# Altium PCB Logic_Analyzer_ASCII.PcbDoc
Units mm, origin at the board's own origin, x right, y up, seen from the top; angles counter-clockwise.
Board outline 38 x 26 mm, 2 copper layers (Top Layer, Bottom Layer); 45 components, 43 nets, 221 pads, 80 vias.
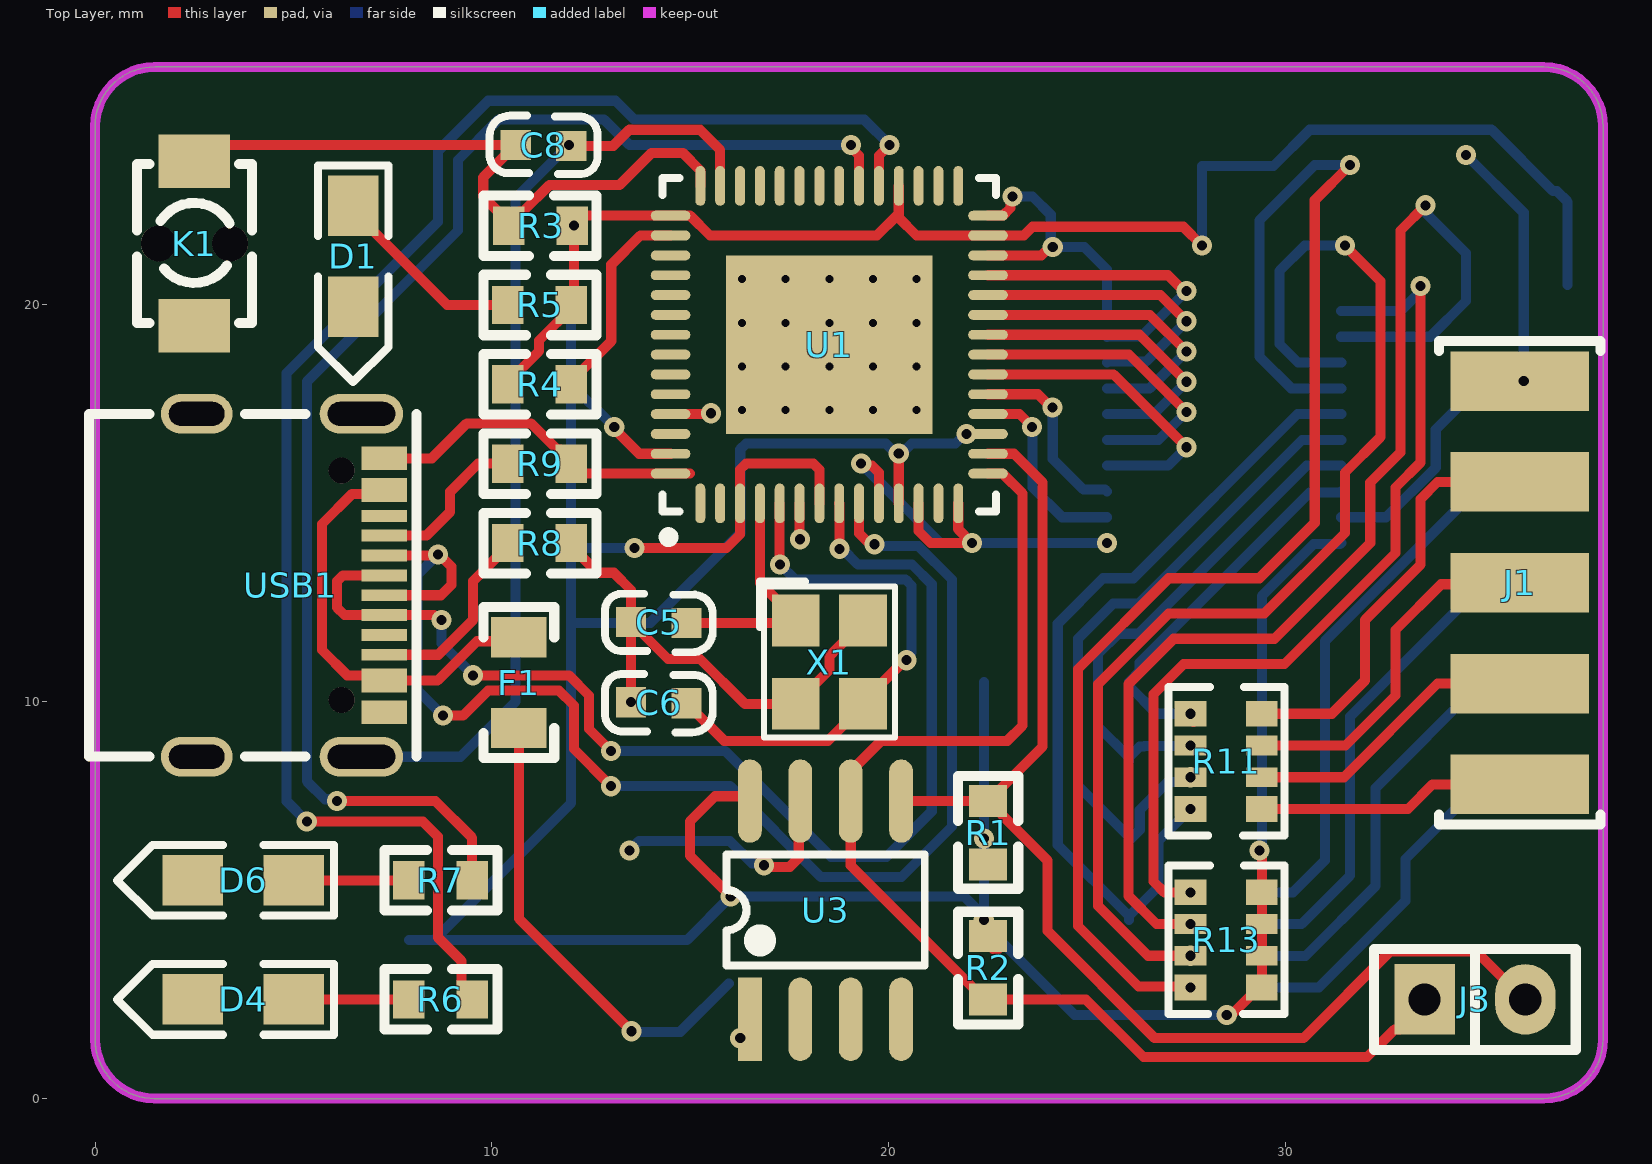
[diagram p0: Top Layer view]
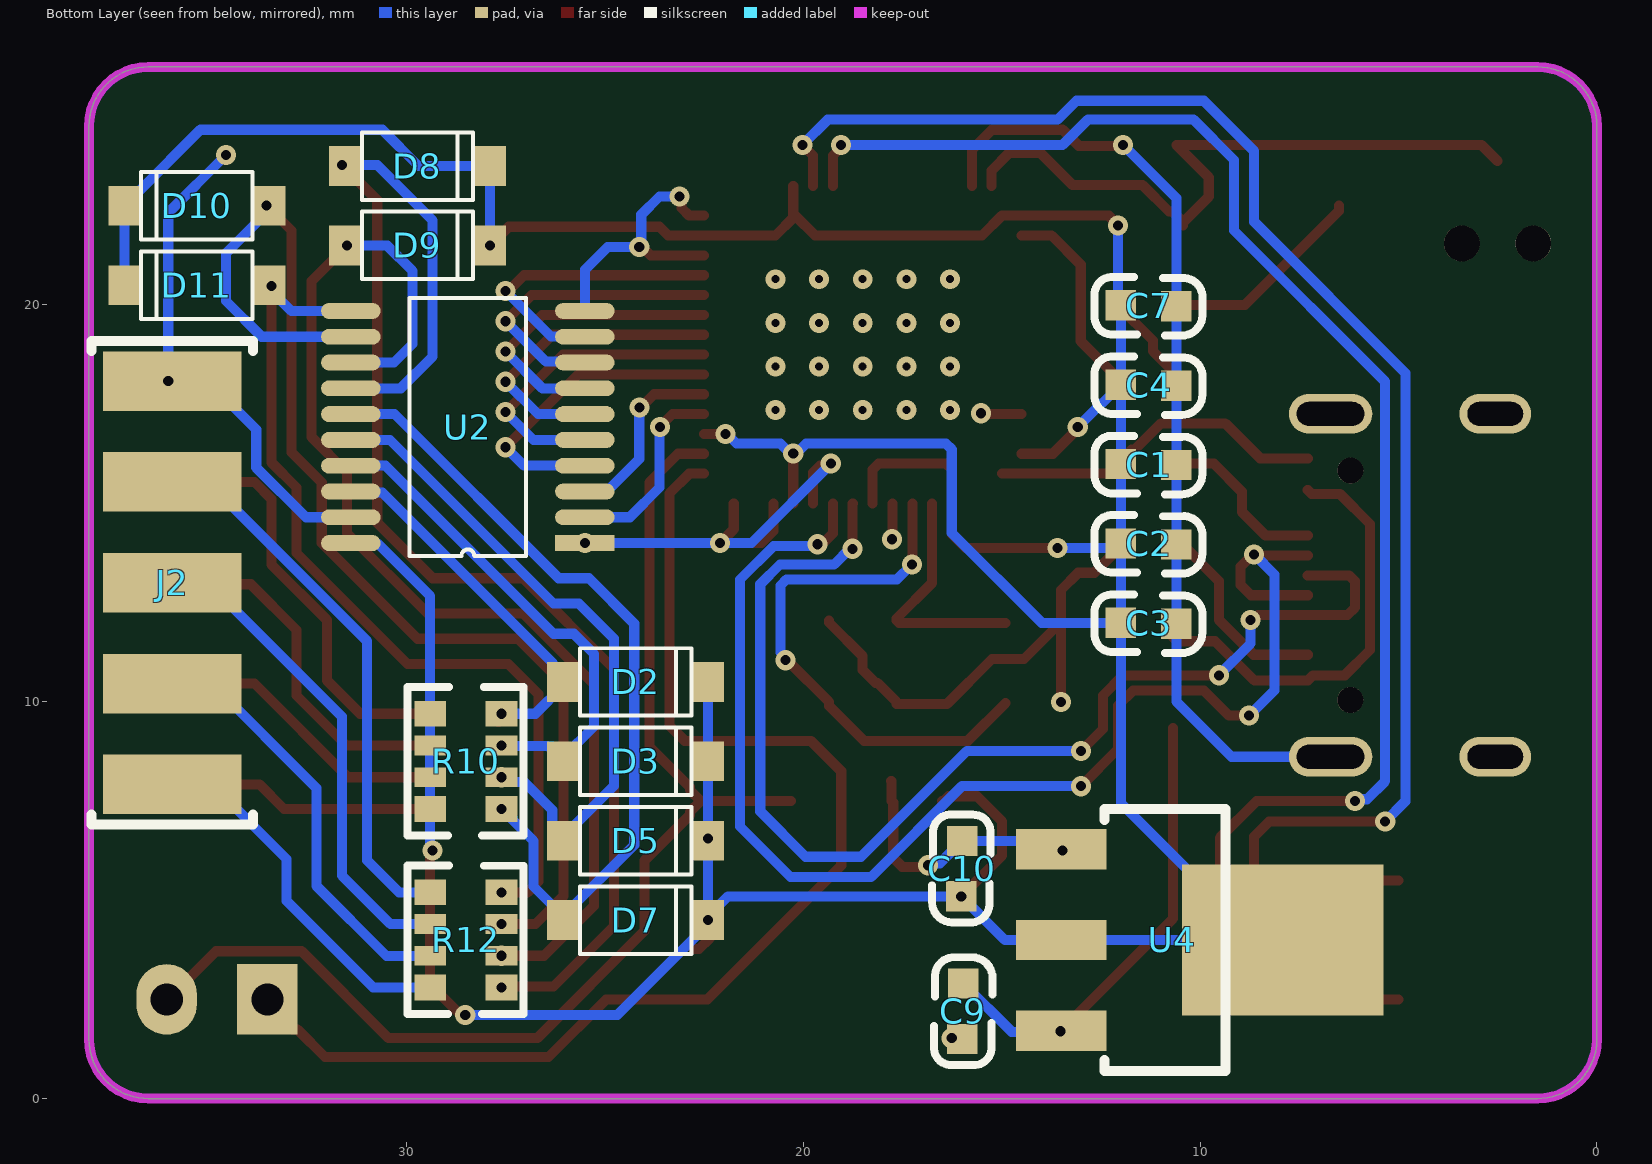
[diagram p1: Bottom Layer view, seen from below]

## Layer stack, top to bottom
Top Solder: solder mask 0.0102, Solder Resist, Dk 3.5
Top Layer: signal copper 0.0356
Dielectric 1: dielectric 0.32, FR-4, Dk 4.8
Bottom Layer: signal copper 0.0356
Bottom Solder: solder mask 0.0102, Solder Resist, Dk 3.5

## Board outline
1.5,0 cw(c1.5,1.5) 0,1.5 0,24.5 cw(c1.5,24.5) 1.5,26 36.5,26 cw(c36.5,24.5) 38,24.5 38,1.5 cw(c36.5,1.5) 36.5,0

## Design rules (kind name [scope] priority, off if disabled: settings)
AssemblyTestPointUsage [All] p0: scope1count=1 scope1_0_kind=Board scope1_0_value=Board scope2count=1 scope2_0_kind=Board scope2_0_value=Board commentlength=0
AssemblyTestpoint [All] p0: scope1count=1 scope1_0_kind=Board scope1_0_value=Board scope2count=1 scope2_0_kind=Board scope2_0_value=Board commentlength=0
Clearance [All] p0: scope1count=1 scope1_0_kind=Board scope1_0_value=Board scope2count=1 scope2_0_kind=Board scope2_0_value=Board commentlength=0 gap=0.127
Clearance [All] p1: gap=0.127 ignorepadtopadclearanceinfootprint=TRUE except(0.254: Arc-Fill Arc-Poly Arc-Region Track-Fill Track-Poly Track-Region SMDPad-Fill SMDPad-Poly SMDPad-Region THPad-Fill THPad-Poly THPad-Region Via-Fill Via-Poly Via-Region Fill-Fill Fill-Poly Fill-Region Poly-Poly Poly-Region Region-Region)
ComponentClearance [All] p0: scope1count=1 scope1_0_kind=Board scope1_0_value=Board scope2count=1 scope2_0_kind=Board scope2_0_value=Board commentlength=0 gap=0.254 collisioncheckmode=3
DiffPairsRouting [All] p0: scope1count=1 scope1_0_kind=Board scope1_0_value=Board scope2count=1 scope2_0_kind=Board scope2_0_value=Board commentlength=0
DiffPairsRouting [All] p1: maxlimit=0.254 minlimit=0.089 mostfreqgap=0.254 toplayer_minwidth=0.089 toplayer_maxwidth=0.762 toplayer_prefwidth=0.381 bottomlayer_minwidth=0.089 bottomlayer_maxwidth=0.762 bottomlayer_prefwidth=0.381 maxuncoupledlength=12.7
FabricationTestPointUsage [All] p0: scope1count=1 scope1_0_kind=Board scope1_0_value=Board scope2count=1 scope2_0_kind=Board scope2_0_value=Board commentlength=0 valid=0 allowmultiple=FALSE
FabricationTestpoint [All] p0: scope1count=1 scope1_0_kind=Board scope1_0_value=Board scope2count=1 scope2_0_kind=Board scope2_0_value=Board commentlength=0 side=3 testpointundercomponent=TRUE minsize=1.016 maxsize=2.54 preferedsize=1.524 minholesize=0 maxholesize=1.016 preferedholesize=0.813 testpointgrid=0.025
FanoutControl Fanout_BGA [All] p0 off: scope1count=1 scope1_0_kind=Board scope1_0_value=Board scope2count=1 scope2_0_kind=Board scope2_0_value=Board commentlength=69 // Protel DXP Scope 1 Expression Was: IsBGA   Fanout_BGA (Default Rule)
FanoutControl Fanout_LCC [All] p0 off: scope1count=1 scope1_0_kind=Board scope1_0_value=Board scope2count=1 scope2_0_kind=Board scope2_0_value=Board commentlength=69 // Protel DXP Scope 1 Expression Was: IsLCC   Fanout_LCC (Default Rule)
FanoutControl Fanout_SOIC [All] p0 off: scope1count=1 scope1_0_kind=Board scope1_0_value=Board scope2count=1 scope2_0_kind=Board scope2_0_value=Board commentlength=71 // Protel DXP Scope 1 Expression Was: IsSOIC   Fanout_SOIC (Default Rule)
FanoutControl Fanout_Small [All] p0 off: scope1count=1 scope1_0_kind=Board scope1_0_value=Board scope2count=1 scope2_0_kind=Board scope2_0_value=Board commentlength=84 // Protel DXP Scope 1 Expression Was: (CompPinCount < 5)   Fanout_Small (Default Rule)
FanoutControl Fanout_Default [All] p0: scope1count=1 scope1_0_kind=Board scope1_0_value=Board scope2count=1 scope2_0_kind=Board scope2_0_value=Board commentlength=30 // Fanout_Default (Default Rule)
Height [All] p0: scope1count=1 scope1_0_kind=Board scope1_0_value=Board scope2count=1 scope2_0_kind=Board scope2_0_value=Board commentlength=0
HoleSize [All] p0: scope1count=1 scope1_0_kind=Board scope1_0_value=Board scope2count=1 scope2_0_kind=Board scope2_0_value=Board commentlength=0 absolutevalues=TRUE maxlimit=2.54 minlimit=0.025 maxpercent=80.000 minpercent=20.000
HoleToHoleClearance [All] p0: scope1count=1 scope1_0_kind=Board scope1_0_value=Board scope2count=1 scope2_0_kind=Board scope2_0_value=Board commentlength=0
LayerPairs [All] p0: scope1count=1 scope1_0_kind=Board scope1_0_value=Board scope2count=1 scope2_0_kind=Board scope2_0_value=Board commentlength=0 enforce=TRUE
MinimumSolderMaskSliver [All] p0: scope1count=1 scope1_0_kind=Board scope1_0_value=Board scope2count=1 scope2_0_kind=Board scope2_0_value=Board commentlength=0
MinimumSolderMaskSliver [All] p1: minsoldermaskwidth=0
NetAntennae [All] p0: scope1count=1 scope1_0_kind=Board scope1_0_value=Board scope2count=1 scope2_0_kind=Board scope2_0_value=Board commentlength=0
PasteMaskExpansion [All] p0: scope1count=1 scope1_0_kind=Board scope1_0_value=Board scope2count=1 scope2_0_kind=Board scope2_0_value=Board commentlength=0 expansion=0
PlaneClearance [All] p0: scope1count=1 scope1_0_kind=Board scope1_0_value=Board scope2count=1 scope2_0_kind=Board scope2_0_value=Board commentlength=0 clearance=0.508
PlaneConnect [All] p0: scope1count=1 scope1_0_kind=Board scope1_0_value=Board scope2count=1 scope2_0_kind=Board scope2_0_value=Board commentlength=0 planeconnectstyle=Relief reliefexpansion=0.508 reliefentries=4 reliefconductorwidth=0.254 reliefairgap=0.254
PolygonConnect [All] p0: scope1count=1 scope1_0_kind=Board scope1_0_value=Board scope2count=1 scope2_0_kind=Board scope2_0_value=Board commentlength=0 connectstyle=Relief reliefconductorwidth=0.254 reliefentries=4 polygonreliefangle="90 Angle"
PolygonConnect [All] p1: connectstyle=Relief reliefconductorwidth=0.254 reliefentries=4 polygonreliefangle="90 Angle" airgapwidth=0.254
RoutingCorners [All] p0: scope1count=1 scope1_0_kind=Board scope1_0_value=Board scope2count=1 scope2_0_kind=Board scope2_0_value=Board commentlength=0 cornerstyle=45-Degree minsetback=2.54 maxsetback=2.54
RoutingLayers [All] p0: scope1count=1 scope1_0_kind=Board scope1_0_value=Board scope2count=1 scope2_0_kind=Board scope2_0_value=Board commentlength=0 top layer=Automatic bottom layer=Automatic
RoutingPriority [All] p0: scope1count=1 scope1_0_kind=Board scope1_0_value=Board scope2count=1 scope2_0_kind=Board scope2_0_value=Board commentlength=0
RoutingTopology [All] p0: scope1count=1 scope1_0_kind=Board scope1_0_value=Board scope2count=1 scope2_0_kind=Board scope2_0_value=Board commentlength=0 topology=Shortest
RoutingVias [All] p0: scope1count=1 scope1_0_kind=Board scope1_0_value=Board scope2count=1 scope2_0_kind=Board scope2_0_value=Board commentlength=0 holewidth=0.711 width=1.27 viastyle="Through Hole" minholewidth=0.2 minwidth=0.4 maxholewidth=6.3 maxwidth=8.3
RoutingVias [All] p1: holewidth=0.711 width=1.27 viastyle="Through Hole" minholewidth=0.2 minwidth=0.4 maxholewidth=6.3 maxwidth=8.3
ShortCircuit [All] p0: scope1count=1 scope1_0_kind=Board scope1_0_value=Board scope2count=1 scope2_0_kind=Board scope2_0_value=Board commentlength=0 allowed=FALSE
SilkToBoardRegionClearance [All] p0: scope1count=1 scope1_0_kind=Board scope1_0_value=Board scope2count=1 scope2_0_kind=Board scope2_0_value=Board commentlength=0
SilkToSilkClearance [All] p0: scope1count=1 scope1_0_kind=Board scope1_0_value=Board scope2count=1 scope2_0_kind=Board scope2_0_value=Board commentlength=0
SilkToSolderMaskClearance [All] p0 off: scope1count=1 scope1_0_kind=Board scope1_0_value=Board scope2count=1 scope2_0_kind=Board scope2_0_value=Board commentlength=44 // Protel DXP Scope 1 Expression Was: IsPad
SilkToSolderMaskClearance [IsPad] p1: minsilkscreentomaskgap=0 clearancetoexposedcopper=TRUE
SolderMaskExpansion [All] p0: scope1count=1 scope1_0_kind=Board scope1_0_value=Board scope2count=1 scope2_0_kind=Board scope2_0_value=Board commentlength=0 expansion=0.102
SolderMaskExpansion [All] p1: expansion=0.102 istentingtop=FALSE
UnRoutedNet [All] p0: scope1count=1 scope1_0_kind=Board scope1_0_value=Board scope2count=1 scope2_0_kind=Board scope2_0_value=Board commentlength=0
UnpouredPolygon [All] p0: scope1count=1 scope1_0_kind=Board scope1_0_value=Board scope2count=1 scope2_0_kind=Board scope2_0_value=Board commentlength=0
Width [All] p0: scope1count=1 scope1_0_kind=Board scope1_0_value=Board scope2count=1 scope2_0_kind=Board scope2_0_value=Board commentlength=0 maxlimit=0.762 minlimit=0.089 preferedwidth=0.254
Width [All] p1: maxlimit=0.762 minlimit=0.089 preferedwidth=0.254
27 further rules are at their usual default settings.

## Components (designator, comment, footprint, x,y, rotation, side; value= is the part's Value field where it differs from the comment)
C1 "100nF" 0603C 12,16 r180 bottom locked
C2 "100nF" 0603C 12,14 r180 bottom locked
C3 "100nF" 0603C 12,12 r180 bottom locked
C4 "100nF" 0603C 12,18 r180 bottom locked
C5 "" 0603C 13.5,12.021 r0 top
C6 "20pF" 0603C 13.5,10 r0 top
C7 "100nF" 0603C 12,20 r180 bottom locked
C8 "100nF" 0603C 12,24 r180 top
C9 "10uF" 0603C 16,1.5 r90 bottom
C10 "10uF" 0603C 15.982,6.5 r270 bottom
D1 "0805R" LED-0805R 6.5,22.5 r270 top
D2 "FR107W" SOD-123 26,10.5 r180 bottom
D3 "FR107W" SOD-123 26,8.5 r180 bottom
D4 "0805B" LED-0805B 5,2.5 r180 top locked
D5 "FR107W" SOD-123 26,6.5 r180 bottom
D6 "0805Y" LED-0805Y 5,5.5 r180 top locked
D7 "FR107W" SOD-123 26,4.5 r180 bottom
D8 "FR107W" SOD-123 31.5,23.5 r180 bottom
D9 "FR107W" SOD-123 31.5,21.5 r180 bottom
D10 "FR107W" SOD-123 33.5,22.5 r0 bottom
D11 "FR107W" SOD-123 33.5,20.5 r0 bottom
F1 "ASMD0805-050" FUSE-0805 10.679,11.5 r270 top
J1 "Pin HDR1X5" "Pin HDR1X5/2.54mm-S-SMD" 35.9,18.08 r180 top
J2 "Pin HDR1X5" "Pin HDR1X5/2.54mm-S-SMD" 35.9,18.08 r0 bottom locked
J3 "Pin HDR1X2" "Pin HDR1X2/2.54mm-S" 33.5,2.5 r90 top
K1 "KEY" SW-SMD_L4.0-W2.9-P4.15-EH 2.5,21.549 r270 top
R1 "10K" 0603R 22.5,7.5 r270 top
R2 "10K" 0603R 22.5,2.5 r90 top
R3 "10K" 0603R 10.425,22 r0 top
R4 "10K" 0603R 12,18 r180 top
R5 "1K" 0603R 12,20 r180 top
R6 "1K" 0603R 9.5,2.5 r180 top locked
R7 "1K" 0603R 9.5,5.5 r180 top locked
R8 "5K1" 0603R 12,14 r180 top locked
R9 "5K1" 0603R 12,16 r180 top
R10 "100K" RES-ARRAY-SMD_0603-8P-L3.2-W1.6-BL 28.5,8.5 r90 bottom locked
R11 "150" RES-ARRAY-SMD_0603-8P-L3.2-W1.6-BL 28.5,8.5 r270 top
R12 "150" RES-ARRAY-SMD_0603-8P-L3.2-W1.6-BL 28.5,4 r90 bottom locked
R13 "100K" RES-ARRAY-SMD_0603-8P-L3.2-W1.6-BL 28.5,4 r270 top locked
U1 "CY7C68013A-56LTXC" CYP-LTX56-5200X4500TP_M 18.5,19 r90 top locked
U2 "74HC245TS" TSSOP20 25.5,14 r0 bottom locked
U3 "AT24C02" SOP8 16.5,2 r90 top
U4 "AMS1117" SOT223 13.5,4 r270 bottom locked
USB1 "TYPE-C16PIN" USB-C-SMD_TYPE-C16PIN 6.7,8.618 r90 top locked
X1 "24Mhz" "OSC 3225-4P" 18.5,11 r270 top locked

## Footprints (in the part's own frame and the unit in brackets; to place one, negate y for a bottom-side part, rotate by r counter-clockwise, add the part's x,y. Pads: shape width x height; smd on the part's side, far side on the other; paste and mask are expansions set on the pad)
0603C [mil]
  rect 30x30 smd: 1(0.21,-0.35) 2(55.21,-1.35)
  silkscreen extent -26,-30 81,28
0603R [mm]
  rect 0.8x0.965 smd: 1(0,0) 2(1.6,0)
  silkscreen extent -0.64,-0.76 2.21,0.76
CYP-LTX56-5200X4500TP_M [mm] "QFN, 56-Leads, Body 8.1x8.1mm, Pitch 0.5mm, Thermal Pad 5.2x4.5mm, IPC Low Density"
  oval 1x0.25 smd: 1(-4,3.25) 2(-4,2.75) 3(-4,2.25) 4(-4,1.75) 5(-4,1.25) 6(-4,0.75) 7(-4,0.25) 8(-4,-0.25) 9(-4,-0.75) 10(-4,-1.25) 11(-4,-1.75) 12(-4,-2.25) 13(-4,-2.75) 14(-4,-3.25) 29(4,-3.25) 30(4,-2.75) 31(4,-2.25) 32(4,-1.75) 33(4,-1.25) 34(4,-0.75) 35(4,-0.25) 36(4,0.25) 37(4,0.75) 38(4,1.25) 39(4,1.75) 40(4,2.25) 41(4,2.75) 42(4,3.25)
  oval 0.25x1 smd: 15(-3.25,-4) 16(-2.75,-4) 17(-2.25,-4) 18(-1.75,-4) 19(-1.25,-4) 20(-0.75,-4) 21(-0.25,-4) 22(0.25,-4) 23(0.75,-4) 24(1.25,-4) 25(1.75,-4) 26(2.25,-4) 27(2.75,-4) 28(3.25,-4) 43(3.25,4) 44(2.75,4) 45(2.25,4) 46(1.75,4) 47(1.25,4) 48(0.75,4) 49(0.25,4) 50(-0.25,4) 51(-0.75,4) 52(-1.25,4) 53(-1.75,4) 54(-2.25,4) 55(-2.75,4) 56(-3.25,4)
  rect 4.5x5.2 smd: 57(0,0)
  silkscreen extent -4.97,-4.2 4.2,4.2
FUSE-0805 [mil]
  rect 40x55 smd: 1(-5,0) 2(85,0)
  silkscreen extent -35,-35 115,35
LED-0805B [mil]
  rect 60x50 smd: A(0,0) K(100,0)
  silkscreen extent -40,-35 175,35
LED-0805R [mil]
  rect 60x50 smd: A(0,0) K(100,0)
  silkscreen extent -40,-35 175,35
LED-0805Y [mil]
  rect 60x50 smd: A(0,0) K(100,0)
  silkscreen extent -40,-35 175,35
"OSC 3225-4P" [mm]
  rect 1.3x1.2 smd: 1(-1.05,-0.85) 2(1.05,-0.85) 3(1.05,0.85) 4(-1.05,0.85)
  silkscreen extent -2.03,-1.75 1.91,1.65
"Pin HDR1X2/2.54mm-S" [mil]
  rect 70x60 hole 32: 1(0,0)
  oval 70x60 hole 32: 2(0,-100)
  silkscreen extent -50,-150 50,50
"Pin HDR1X5/2.54mm-S-SMD" [mm]
  rect 3.5x1.5 smd: 1(0,0) 2(0,2.54) 3(0,5.08) 4(0,7.62) 5(0,10.16)
  silkscreen extent -2.03,-1.02 2.03,11.18
RES-ARRAY-SMD_0603-8P-L3.2-W1.6-BL [mm]
  rect 0.65x0.8 smd: 1(-1.2,-0.9) 4(1.2,-0.9) 5(1.2,0.9) 8(-1.2,0.9)
  rect 0.5x0.8 smd: 2(-0.4,-0.9) 3(0.4,-0.9) 6(0.4,0.9) 7(-0.4,0.9)
  silkscreen extent -1.87,-1.45 1.87,1.47
SOD-123 [mm] "塑封二极管"
  rect 0.8x1 smd: A(-0.051,0) K(3.607,0)
  silkscreen extent 0.38,-0.85 3.18,0.85
SOP8 [mm]
  rect 2.1x0.6 smd: 1(0,0)
  oval 2.1x0.6 smd: 2(0,-1.27) 3(0,-2.54) 4(0,-3.81) 5(5.5,-3.81) 6(5.5,-2.54) 7(5.5,-1.27) 8(5.5,0)
  silkscreen extent 1.35,-4.41 4.15,0.6
SOT223 [mil]
  rect 40x90 smd: 1(-90,0) 2(0,0) 3(90,0)
  rect 150x200 smd: 2(0,220)
  silkscreen extent -130,43 130,163
SW-SMD_L4.0-W2.9-P4.15-EH [mm]
  rect 1.35x1.8 smd: 1(-2.075,0) 3(2.075,0)
  round 0.9 hole 0.9 unplated: ""(0,0.9) ""(0,-0.9)
  silkscreen extent -2,-1.45 2,1.45
TSSOP20 [mm]
  rect 1.5x0.4 smd: 1(0,0)
  oval 1.5x0.4 smd: 2(0,-0.65) 3(0,-1.3) 4(0,-1.95) 5(0,-2.6) 6(0,-3.25) 7(0,-3.9) 8(0,-4.55) 9(0,-5.2) 10(0,-5.85) 11(5.9,-5.85) 12(5.9,-5.2) 13(5.9,-4.55) 14(5.9,-3.9) 15(5.9,-3.25) 16(5.9,-2.6) 17(5.9,-1.95) 18(5.9,-1.3) 19(5.9,-0.65) 20(5.9,0)
  silkscreen extent 1.48,-6.18 4.42,0.33
USB-C-SMD_TYPE-C16PIN [mm]
  oval 1x2.1 hole 0.6 slot 1.7 at 90 deg: 1(8.638,-0.009) 2(-0.002,-0.009)
  oval 1x1.8 hole 0.6 slot 1.4 at 90 deg: 3(8.638,4.14) 4(-0.002,4.14)
  rect 0.6x1.15 smd: A1B12(7.518,-0.584) A4B9(6.718,-0.584) B1A12(1.118,-0.584) B4A9(1.918,-0.584)
  rect 0.3x1.15 smd: A5(5.568,-0.584) A6(4.568,-0.584) A7(4.068,-0.584) A8(6.068,-0.584) B5(2.568,-0.584) B6(3.568,-0.584) B7(5.068,-0.584) B8(3.068,-0.584)
  round 0.65 hole 0.65 unplated: ""(1.428,0.49) ""(7.208,0.49)
  silkscreen extent 0,-1.4 8.64,6.86

## Part data
C1 C2 C3 C4 C5 C6 C7 C8 C9 C10: library part CAP, "无极性电容"
D1 D4 D6: library part LED
D2 D3 D5 D7 D8 D9 D10 D11: library part DIODE, "普通二极管"
F1: library part FUSE
R1 R2 R3 R4 R5 R6 R7 R8 R9: library part RES
R10 R11 R12 R13: library part RES_ARRAY*4, "网络排阻4R"
U1: "EZ-USB(R) FX2LP(TM) USB Microcontroller High-Speed USB Peripheral Controller, 16 KB, 24 I/Os, 3 to 3.6 V, 0 to 70 degC, 56-Pin QFN (LTX56), Tray"
U4: "三端稳压芯片"
USB1: library part USB-C_16PIN
X1: library part XTAL-4P, "4脚无源晶振"

## Via types
v1: diameter 0.508, hole 0.254, Top Layer to Bottom Layer, tented both sides, 60 vias
v2: diameter 0.5, hole 0.2, Top Layer to Bottom Layer, 20 vias

## Nets (pads, with @x,y where several pads share a name; then routed paths per layer and width w, separated by ;. In a path a pad name is that pad's centre, name@x,y a point inside that pad or via, vN(x,y) a via of type N, cw(c..) or ccw(c..) an arc to the next point about the centre after c; other vN are vias at no path point)
3V3: C1.1 C2.1 C3.1 C4.1 C7.1 C10.2 D2.K D3.K D5.K D7.K D8.K D9.K D10.K D11.K R1.2 R2.2 R3.2 R4.2 R5.1 R10.5 R10.6 R10.7 R10.8 R13.5 R13.6 R13.7 R13.8 U1.3 U1.7 U1.11 U1.17 U1.27 U1.32 U1.43 U1.55 U2.20 U3.8 U4.2 | length 130.8
  Top Layer w0.254: R4.2 10.4,18.082 10.673,18.355 10.703,18.355 11.185,18.837 11.185,19.103 R5.1@12.065,19.983 ; R5.1 12.065,20.065 12.065,22.017 12.298,22.25 U1.43 14.993,22.25 15.494,21.749 19.699,21.749 20.2,22.25 20.25,22.2 ; v1(13.081,16.923) 13.081,16.879 13.71,16.25 U1.55 ; v1(13.589,13.875) 15.908,13.875 16.25,14.217 16.25,15.853 16.399,16.002 18.099,16.002 18.248,15.853 18.248,15.002 U1.7 ; v1(16.016,5.098) 14.986,6.128 14.986,6.985 15.621,7.62 16.34,7.62 16.46,7.5 U3.8 ; U1.11 v1(20.25,16.253) ; U1.32 20.25,22.2 ; v1(21.957,16.75) U1.17 ; R2.2@22.352,4.045 22.625,3.772 R2.2@22.759,3.772 ; v1(22.393,4.5) 22.393,4.207 R2.2 ; v1(27.893,21.5) 27.422,21.971 23.622,21.971 23.401,21.75 U1.27 20.7,21.75 20.25,22.2 ; v1(28.517,2.109) 28.565,2.157 28.682,2.157 29.325,2.8 R13.5 ; R13.5@29.325,2.8 R13.5 ; v1(29.337,6.255) 29.337,6.186 29.4,6.123 R13.8 R13.7 R13.6 R13.5
  Bottom Layer w0.254: U4.2@7.912,4 U4.2@8.547,4 ; C2.1@11.995,13.875 C3.1 ; v1(12.065,22.003) 12.065,20.061 C7.1 C4.1 ; v1(13.081,16.923) 12.475,17.529 12.456,17.529 C4.1 ; v1(13.589,13.875) 12.111,13.875 C2.1 C1.1 C4.1 ; v1(21.957,16.75) 21.921,16.75 21.681,16.51 20.576,16.51 20.319,16.253 20.181,16.253 19.924,16.51 16.405,16.51 16.256,16.361 16.256,14.256 13.991,11.991 C3.1 ; D2.K D3.K D5.K D7.K@22.393,4.6 ; v1(27.893,21.5) D8.K 29.691,23.5 30.607,24.416 35.191,24.416 36.734,22.873 36.834,22.873 37.107,22.6 D10.K D11.K ; v1(28.517,2.109) 24.684,2.109 23.622,3.171 22.393,4.4 v1(22.393,4.5) D7.K@22.393,4.6 ; v1(29.337,6.255) 29.337,6.324 29.4,6.387 R10.8 R10.7 R10.6 R10.5 29.4,12.668 30.704,13.972 31.372,13.972 U2.20 ; U4.2@8.547,4 11.995,7.448 C3.1 ; U4.2@8.547,4 13.5,4 14.919,4 v1(16.016,5.098) 21.896,5.098 D7.K@22.393,4.6
  other v1: 22.396,6.553
GND: C1.2 C2.2 C3.2 C4.2 C5.1 C6.1 C7.2 C8.1 C9.1 C10.1 D1.K D4.K D6.K J1.1 J2.1 K1.3 R8.1 R9.1 U1.6 U1.10 U1.12 U1.14 U1.26 U1.28 U1.41 U1.53 U1.56 U2.1 U2.10 U2.19 U3.1 U3.2 U3.3 U3.4 U3.7 U4.1 USB1.1 USB1.2 USB1.3 USB1.4 USB1.A1B12 USB1.B1A12 X1.2 X1.4 | length 85.9
  Top Layer w0.254: USB1.A1B12 8.484,16.136 9.366,17.018 10.982,17.018 11.645,16.355 11.727,16.355 12,16.082 R9.1 12.25,15.75 U1.56 U1.56@14.988,15.75 ; C8.1 13.055,24.009 13.462,24.416 15.24,24.416 15.75,23.906 U1.41 ; R8.1 12,13.918 12.666,13.252 13.069,13.252 13.505,12.816 C5.1 ; v1(13.505,9.991) C5.1 ; U1.53 14.502,17.252 15.499,17.252 v1(15.519,17.272) ; v1(16.855,5.881) 16.894,5.842 17.504,5.842 17.731,6.069 17.731,7.461 U3.7 17.77,7.991 U3.7@17.78,8.001 ; U1.6 17.752,14.998 17.752,14.103 v1(17.758,14.097) ; v1(19.304,16.002) 19.353,15.953 19.571,15.953 19.75,15.774 U1.10 ; X1.4 19.35,12 18.5,11.15 18.5,10.8 18.173,10.473 18.123,10.473 17.65,10 X1.2 16.371,9.95 15.24,11.081 14.436,11.081 C5.1 ; U1.12 20.75,14.302 21.05,14.002 v1(22.098,14.002) 21.75,14.35 U1.14 ; U1.26 23.848,21.25 24.061,21.463 v1(24.13,21.463) ; U1.28 22.871,22.25 23.065,22.444 23.065,22.684 v1(23.114,22.733)
  Bottom Layer w0.254: USB1.2 9.205,8.616 10.598,10.008 C3.2 C2.2 C1.2 C4.2 C7.2 10.598,22.695 v1(11.938,24.035) ; v1(13.462,6.255) 13.702,6.495 C10.1 16.556,5.93 16.806,5.93 v1(16.855,5.881) ; v1(19.304,16.002) 21.304,14.002 v1(22.098,14.002) v1(22.098,14.002) 25.499,14.001 v1(25.5,14) ; v1(23.114,22.733) 23.622,22.733 24.081,22.274 24.081,21.512 v1(24.13,21.463) 24.924,21.463 25.5,20.887 U2.10 ; U2.19 32.531,14.65 33.782,15.901 33.782,16.862 35,18.08 v1(36,18.08) 36,22.325 v1(34.544,23.781)
  other v1: 16.256,1.524
I2C_SCL: J3.1 R2.1 U1.15 U3.6 | length 31.4
  Top Layer w0.254: U1.15 22.871,15.75 23.368,15.253 23.368,9.398 22.987,9.017 19.807,9.017 19.04,8.25 U3.6 19.04,5.878 22.418,2.5 R2.1 24.964,2.5 26.416,1.048 32.048,1.048 32.738,1.738 32.865,1.738 33.5,2.373 J3.1 ; J3.1@34,2.373 J3.1@34,2.5
I2C_SDA: J3.2 R1.1 U1.16 U3.5 | length 31.1
  Top Layer w0.254: U3.5 R1.1 R1.1@22.582,7.5 ; U1.16 23.152,16.25 23.876,15.526 23.876,8.876 22.855,7.855 22.855,7.773 R1.1@22.582,7.5 ; J3.2 36.013,2.5 34.798,3.715 32.639,3.715 30.448,1.524 26.702,1.524 24.003,4.223 24.003,5.997 22.855,7.144 22.855,7.227 R1.1@22.582,7.5 ; J3.2@36.54,2.5 J3.2@36.54,2.627
IN0: D2.A R10.4 R11.1 U2.18 | length 9.4
  Top Layer w0.254: R11.1@27.675,9.487 R11.1@27.681,9.493
  Bottom Layer w0.254: v1(27.6,9.7) 26.751,9.7 26.051,10.4 D2.A 26.324,10.773 26.324,10.989 30.607,15.272 31.372,15.272 U2.18
IN1: D3.A R10.3 R11.2 U2.17 | length 12.8
  Bottom Layer w0.254: D3.A D3.A@26.051,8.6 ; v1(27.6,8.9) 27.59,8.89 26.441,8.89 26.424,8.873 26.324,8.873 D3.A@26.051,8.6 ; U2.17 30.523,15.95 26.289,11.716 25.781,11.716 25.273,11.208 25.273,9.378 D3.A@26.051,8.6
IN2: D5.A R10.2 R11.3 U2.16 | length 16.8
  Bottom Layer w0.254: v1(27.6,8.1) 27.485,7.985 27.035,7.985 26.324,7.274 26.324,6.773 D5.A 26.051,6.6 24.765,7.886 24.765,11.589 25.654,12.478 26.289,12.478 30.411,16.6 U2.16
IN3: D7.A R10.1 R11.4 U2.15 | length 20.9
  Bottom Layer w0.254: D7.A D7.A@26.051,4.6 ; v1(27.6,7.3) 27.525,7.3 27.327,7.102 27.327,7.027 26.797,6.497 26.797,5.346 D7.A@26.051,4.6 ; U2.15 30.299,17.25 26.162,13.113 25.4,13.113 24.257,11.97 24.257,6.394 D7.A@26.051,4.6
IN4: D8.A R12.1 R13.4 U2.14 | length 35.5
  Top Layer w0.254: v1(27.6,2.8) 27.574,2.826 26.289,2.826 24.765,4.35 24.765,10.827 27.051,13.113 29.337,13.113 30.734,14.51 30.734,22.638 v1(31.623,23.527)
  Bottom Layer w0.254: U2.14 30.138,17.9 29.337,18.701 29.337,22.13 30.734,23.527 31.524,23.527 D8.A
IN5: D9.A R12.2 R13.3 U2.13 | length 29.8
  Top Layer w0.254: v1(27.6,3.6) 26.531,3.6 25.273,4.858 25.273,10.446 27.051,12.224 29.464,12.224 31.496,14.256 31.496,15.78 32.385,16.669 32.385,20.606 v1(31.496,21.495)
  Bottom Layer w0.254: U2.13 30.312,18.55 29.845,19.017 29.845,20.86 30.48,21.495 31.456,21.495 D9.A@31.551,21.4
IN6: D10.A R12.3 R13.2 U2.12 | length 30.2
  Top Layer w0.254: v1(27.6,4.4) 26.747,4.4 26.035,5.112 26.035,10.446 27.178,11.589 29.718,11.589 32.131,14.002 32.131,15.526 32.893,16.288 32.893,21.876 v1(33.528,22.511)
  Bottom Layer w0.254: U2.12 33.646,19.2 34.544,20.098 34.544,21.305 33.449,22.4 D10.A
IN7: D11.A R12.4 R13.1 U2.11 | length 22.7
  Top Layer w0.254: v1(27.6,5.2) 26.943,5.2 26.67,5.473 26.67,10.192 27.432,10.954 29.972,10.954 32.766,13.748 32.766,15.399 33.401,16.034 v1(33.401,20.479)
  Bottom Layer w0.254: U2.11 32.899,19.85 33.449,20.4 D11.A
NetC5_2: C5.2 U1.4 X1.1 | length 6.1
  Top Layer w0.254: C5.2 17.586,11.986 X1.1 17.65,12.1 16.75,13 U1.4
NetC6_2: C6.2 U1.5 X1.3 | length 13.9
  Top Layer w0.254: C6.2 15.851,9.017 18.467,9.017 19.35,9.9 19.35,10 20.399,11.049 v1(20.447,11.049) ; U1.5 17.25,13.47 v1(17.258,13.462)
  Bottom Layer w0.254: v1(17.258,13.462) 17.639,13.081 20.425,13.081 20.574,12.932 20.574,11.245 20.447,11.118 v1(20.447,11.049)
NetC8_2: C8.2 K1.1 R3.1 U1.42 | length 17
  Top Layer w0.254: K1.1 2.91,24.034 C8.2 9.779,23.216 9.779,22.729 R3.1@10.425,22.082 ; R3.1 R3.1@10.425,22.082 ; U1.42 15.25,23.39 14.806,23.834 14.023,23.834 13.208,23.019 11.444,23.019 10.781,22.355 10.698,22.355 R3.1@10.425,22.082
NetC9_2: C9.2 F1.2 U4.3 | length 11.8
  Top Layer w0.254: F1.2 10.679,4.535 v1(13.516,1.699)
  Bottom Layer w0.254: U4.3 13.531,1.683 14.746,1.683 C9.2
NetD1_A: D1.A R5.2 | length 5
  Top Layer w0.254: D1.A 6.5,22.373 8.873,20 R5.2
NetD4_A: D4.A R6.2 | length 2.9
  Top Layer w0.254: D4.A R6.2
NetD6_A: D6.A R7.2 | length 2.9
  Top Layer w0.254: D6.A R7.2
NetJ1_2: J1.2 R11.8 | length 10.8
  Top Layer w0.254: R11.8 31.163,9.7 32.004,10.541 32.004,12.065 33.401,13.462 33.401,15.113 33.828,15.54 J1.2
NetJ1_3: J1.3 R11.7 | length 9.2
  Top Layer w0.254: R11.7 31.506,8.9 32.766,10.16 32.766,11.811 33.918,12.963 35.863,12.963 J1.3
NetJ1_4: J1.4 R11.6 | length 7.5
  Top Layer w0.254: R11.6 31.468,8.1 33.828,10.46 J1.4
NetJ1_5: J1.5 R11.5 | length 6.8
  Top Layer w0.254: R11.5 33.081,7.3 33.701,7.92 J1.5
NetJ2_2: J2.2 R12.5 | length 14.1
  Bottom Layer w0.254: R12.5 30.187,5.2 30.988,6.001 30.988,11.528 33.909,14.449 35,15.54 J2.2@36,15.54
NetJ2_3: J2.3 R12.6 | length 12.5
  Bottom Layer w0.254: R12.6 30.403,4.4 31.623,5.62 31.623,9.623 35,13 J2.3@36,13
NetJ2_4: J2.4 R12.7 | length 10.8
  Bottom Layer w0.254: R12.7 29.404,3.596 30.502,3.596 32.268,5.362 32.268,7.828 34.9,10.46 J2.4
NetJ2_5: J2.5 R12.8 | length 9.2
  Bottom Layer w0.254: R12.8 30.835,2.8 33.02,4.985 33.02,6.04 34.9,7.92 J2.5
NetR4_1: R4.1 U1.44 | length 5.2
  Top Layer w0.254: R4.1 12,18.082 13.005,19.088 13.005,21.016 13.738,21.748 14.498,21.748 U1.44
NetR8_2: R8.2 USB1.B5 | length 4.9
  Top Layer w0.254: USB1.B5 8.646,11.186 9.525,12.065 9.525,13.042 10.4,13.918 R8.2
NetR9_2: R9.2 USB1.A5 | length 4.2
  Top Layer w0.254: USB1.A5 8.344,14.186 8.946,14.788 8.946,15.296 9.65,16 R9.2
NetU1_18: U1.18 U2.2 | length 5
  Top Layer w0.254: U1.18 23.295,17.25 23.607,16.938 v1(23.607,16.923)
  Bottom Layer w0.254: v1(23.607,16.923) 23.622,16.908 23.622,15.399 24.371,14.65 U2.2
NetU1_19: U1.19 U2.3 | length 4.8
  Top Layer w0.254: U1.19 23.758,17.75 24.093,17.415 v1(24.127,17.415)
  Bottom Layer w0.254: v1(24.127,17.415) 24.13,17.412 24.13,16.12 24.902,15.348 25.452,15.348 U2.3
NetU1_20: U1.20 U2.4 | length 8
  Top Layer w0.254: U1.20 25.665,18.25 v1(27.5,16.415)
  Bottom Layer w0.254: U2.4 27.035,15.95 v1(27.5,16.415)
NetU1_21: U1.21 U2.5 | length 7.9
  Top Layer w0.254: U1.21 26.054,18.75 v1(27.5,17.304)
  Bottom Layer w0.254: U2.5 26.796,16.6 v1(27.5,17.304)
NetU1_22: U1.22 U2.6 | length 7.8
  Top Layer w0.254: U1.22 26.316,19.25 v1(27.5,18.066)
  Bottom Layer w0.254: U2.6 26.684,17.25 v1(27.5,18.066)
NetU1_23: U1.23 U2.7 | length 7.8
  Top Layer w0.254: U1.23 26.578,19.75 v1(27.5,18.828)
  Bottom Layer w0.254: U2.7 26.572,17.9 v1(27.5,18.828)
NetU1_24: U1.24 U2.8 | length 7.7
  Top Layer w0.254: U1.24 26.84,20.25 v1(27.5,19.59)
  Bottom Layer w0.254: U2.8 25.524,18.574 26.484,18.574 v1(27.5,19.59)
NetU1_25: U1.25 U2.9 | length 7.6
  Top Layer w0.254: U1.25 27.033,20.75 27.431,20.352 v1(27.5,20.352)
  Bottom Layer w0.254: U2.9 25.508,19.208 26.356,19.208 v1(27.5,20.352)
PA0: R6.1 U1.33 | length 40.1
  Top Layer w0.254: v1(5.334,6.985) 8.255,6.985 8.636,6.604 8.636,4.064 9.227,3.473 9.227,2.773 R6.1 ; U1.33 19.75,23.769 v1(20.016,24.035)
  Bottom Layer w0.254: v1(5.334,6.985) 4.826,7.493 4.826,18.288 8.636,22.098 8.636,23.876 9.906,25.146 13.113,25.146 13.589,24.67 19.381,24.67 v1(20.016,24.035)
PA1: R7.1 U1.34 | length 34.8
  Top Layer w0.254: v1(6.092,7.497) 8.576,7.497 9.5,6.573 R7.1 ; v1(19.05,24.035) 19.05,23.966 19.248,23.768 19.248,23.002 U1.34
  Bottom Layer w0.254: v1(6.092,7.497) 6.044,7.545 5.79,7.545 5.334,8.001 5.334,18.066 9.144,21.876 9.144,23.654 10.16,24.67 12.827,24.67 13.462,24.035 v1(19.05,24.035)
USB_N: U1.9 USB1.A7 USB1.B7 | length 34.6
  Top Layer w0.254: USB1.A7 8.717,12.686 8.975,12.944 8.975,13.409 8.698,13.686 USB1.B7 ; v1(8.763,9.652) 9.271,9.652 9.906,10.287 11.684,10.287 12.065,9.906 12.065,8.809 v1(13,7.874) ; U1.9 19.25,14.246 19.477,14.019 19.591,14.019 v1(19.64,13.97)
  Bottom Layer w0.254: v1(8.636,13.716) 8.128,13.208 8.128,10.287 v1(8.763,9.652) ; v1(13,7.874) 16.002,7.874 18.288,5.588 20.32,5.588 21.59,6.858 21.59,13.081 20.742,13.929 19.681,13.929 v1(19.64,13.97)
USB_P: U1.8 USB1.A6 USB1.B6 | length 30.4
  Top Layer w0.254: USB1.A6 6.245,13.186 6.096,13.037 6.096,12.373 6.283,12.186 USB1.B6 7.287,12.189 8.536,12.189 8.66,12.065 v1(8.729,12.065) ; v1(9.525,10.668) 11.938,10.668 12.446,10.16 12.446,9.317 v1(13,8.763) ; U1.8 18.752,14.998 18.752,13.862 v1(18.758,13.856)
  Bottom Layer w0.254: v1(8.729,12.065) 8.729,11.464 v1(9.525,10.668) ; v1(13,8.763) 15.875,8.763 18.542,6.096 19.939,6.096 21.082,7.239 21.082,12.963 20.583,13.462 19.22,13.462 18.827,13.856 v1(18.758,13.856)
VBUS: F1.1 USB1.A4B9 USB1.B4A9 | length 10.8
  Top Layer w0.254: USB1.A4B9 7.188,15.24 6.477,15.24 5.715,14.478 5.715,11.303 6.35,10.668 7.153,10.668 USB1.B4A9 8.631,10.536 9.621,11.526 10.579,11.526 F1.1
pads on no net: K1. U1.1 U1.2 U1.13 U1.29 U1.30 U1.31 U1.35 U1.36 U1.37 U1.38 U1.39 U1.40 U1.45 U1.46 U1.47 U1.48 U1.49 U1.50 U1.51 U1.52 U1.54 U1.57 USB1. USB1.A8 USB1.B8
copper on no net:
  other v2: 16.3,17.35 17.4,17.35 18.5,17.35 19.6,17.35 20.7,17.35 16.3,18.45 17.4,18.45 18.5,18.45 19.6,18.45 20.7,18.45 16.3,19.55 17.4,19.55 18.5,19.55 19.6,19.55 20.7,19.55 16.3,20.65 17.4,20.65 18.5,20.65 19.6,20.65 20.7,20.65

## Polygon pours and split planes (outlines as drawn)
GND on Bottom Layer "GND_L02_P001" (solid, pour order 1): 1.5,0 cw(c1.5,1.5) 0,1.5 0,24.5 cw(c1.5,24.5) 1.5,26 36.5,26 cw(c36.5,24.5) 38,24.5 38,1.5 cw(c36.5,1.5) 36.5,0
GND on Top Layer "GND_L01_P000" (solid, pour order 0): 1.5,0 cw(c1.5,1.5) 0,1.5 0,24.5 cw(c1.5,24.5) 1.5,26 36.5,26 cw(c36.5,24.5) 38,24.5 38,1.5 cw(c36.5,1.5) 36.5,0

## Keep-outs
Keep-Out Layer:
  the board outline again, w0.254

## Text inside footprints (layer, text, board x,y; h text height)
U1: Mechanical 13 "20pF" at 13.005,8.858 h1.52